# Altium PCB GPIOExpander.PcbDoc
Units mm, origin at the board's own origin, x right, y up, seen from the top; angles counter-clockwise.
Board outline 30.1 x 31.24 mm, 2 copper layers (Top Layer, Bottom Layer); 23 components, 36 nets, 92 pads, 14 vias.
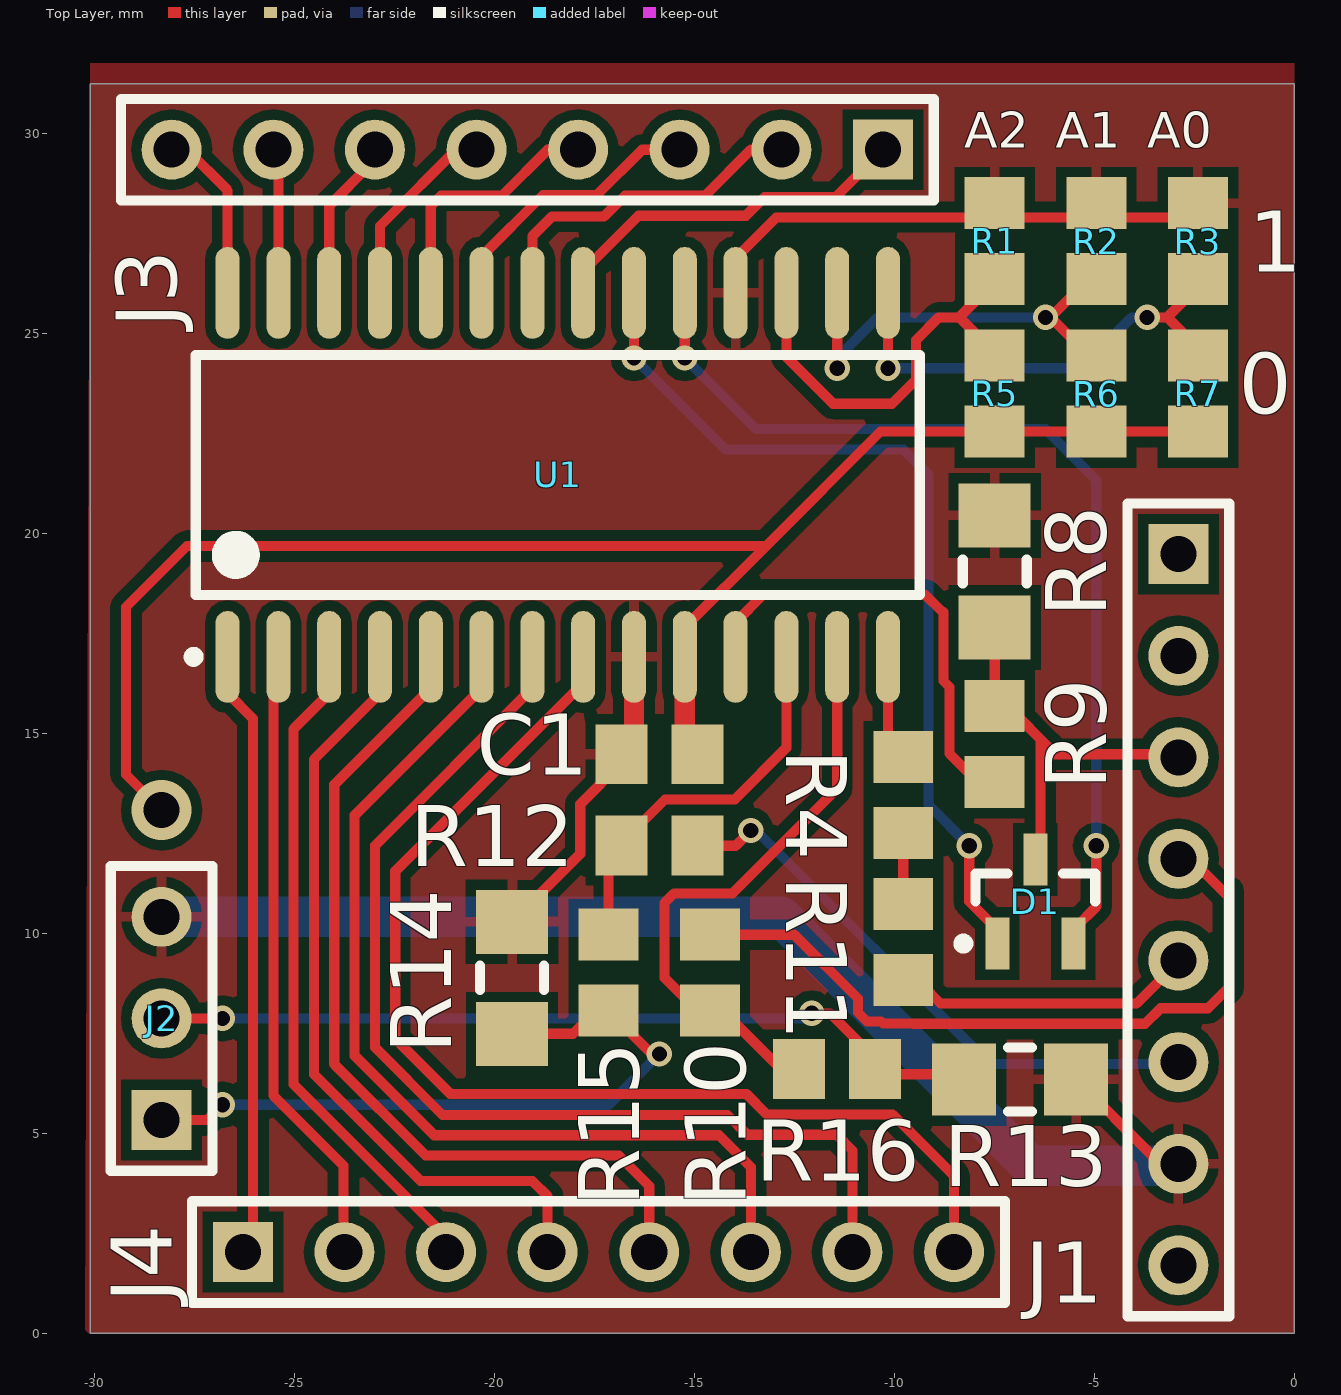
[diagram p0: Top Layer view]
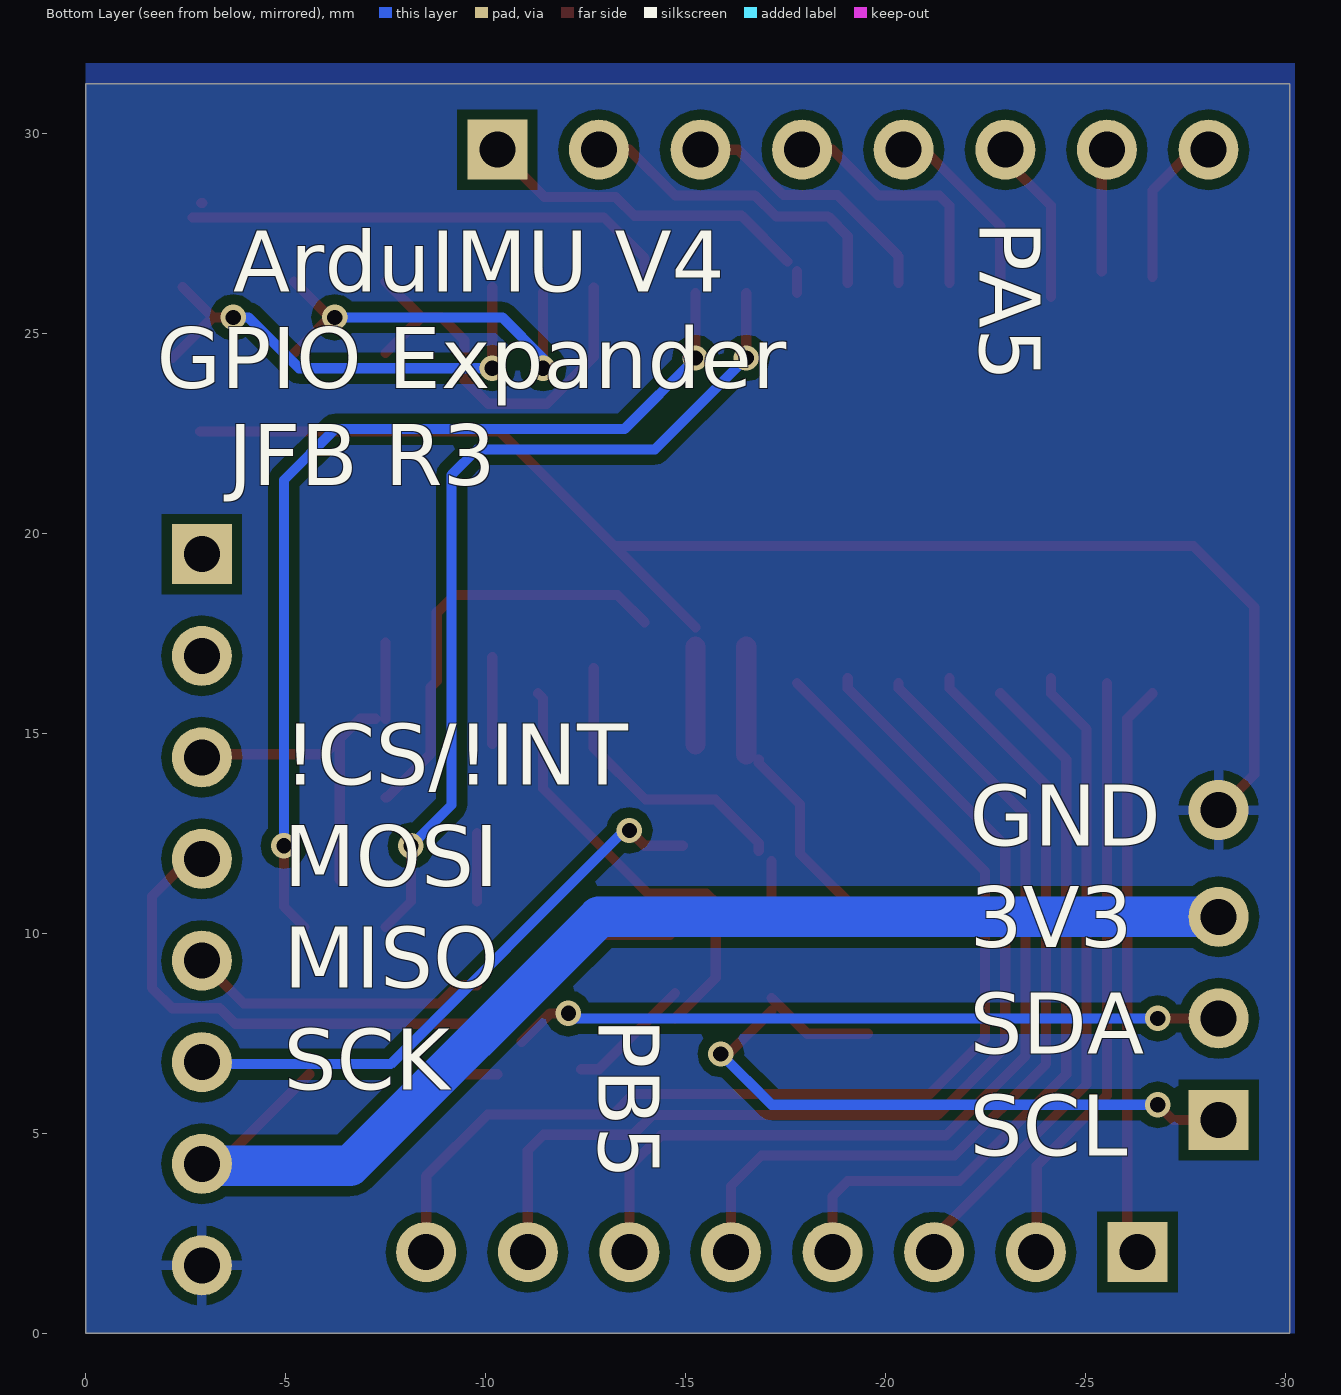
[diagram p1: Bottom Layer view, seen from below]

## Layer stack, top to bottom
Top Layer: signal copper 0.0356
Dielectric: core 0.32, FR-4, Dk 4.8
Bottom Layer: signal copper 0.0356

## Board outline
-30.099,0 -30.099,31.242 0,31.242 0,0

## Design rules (kind name [scope] priority, off if disabled: settings)
Clearance [All] p1: gap=0.254
PolygonConnect [All] p1: connectstyle=Relief reliefconductorwidth=0.254 reliefentries=4 polygonreliefangle="90 Angle" airgapwidth=0.254
RoomDefinition GPIOExpander [InComponentClass('GPIOExpander')] p1: confinementstyle=ConfineIn formatcopy=TRUE lockcomponents=FALSE outline -30.226,0 0,0 0,31.75 -30.226,31.75
RoutingVias microVias [All] p1: holewidth=0.001 width=0.001 viastyle="Through Hole" minholewidth=0 minwidth=0 maxholewidth=0 maxwidth=0.001
RoutingVias [All] p2: holewidth=0.711 width=1.27 viastyle="Through Hole" minholewidth=0.711 minwidth=1.27 maxholewidth=0.711 maxwidth=1.27
SolderMaskExpansion [All] p1: expansion=0.102
Width [All] p1: maxlimit=1.27 minlimit=0.254 preferedwidth=0.254
28 further rules are at their usual default settings.

## Components (designator, comment, footprint, x,y, rotation, side; value= is the part's Value field where it differs from the comment)
C1 "Cap" 6-0805 -15.875,14.478 r180 top
D1 "BAT54A" SOT23_N -6.477,10.795 r90 top
J1 "ArduIMU_Connector" HDR1X8 -2.9,19.48 r270 top
J2 "ArduIMU_I2C" HDR1X3 -28.321,5.334 r90 top
J3 "GPIO_A1" HDR1X8 -10.287,29.591 r180 top
J4 "GPIO_B1" HDR1X8 -26.289,2.032 r0 top
R1 "0" 6-0805 -7.493,27.305 r90 top
R2 "0" 6-0805 -4.953,27.305 r90 top
R3 "0" 6-0805 -2.413,27.305 r90 top
R4 "0" 6-0805 -9.779,13.462 r270 top
R5 "0" 6-0805 -7.493,23.495 r90 top
R6 "0" 6-0805 -4.953,23.495 r90 top
R7 "0" 6-0805 -2.413,23.495 r90 top
R8 "10K" 8-1206 -7.493,19.05 r270 top
R9 "0" 6-0805 -7.493,14.732 r270 top
R10 "0" 6-0805 -14.605,9.017 r90 top
R11 "0" 6-0805 -9.779,9.779 r270 top
R12 "0" 6-0805 -15.875,12.192 r0 top
R13 "10K" 8-1206 -6.858,6.35 r180 top
R14 "10K" 8-1206 -19.558,8.89 r270 top
R15 "0" 6-0805 -17.145,9.017 r270 top
R16 "0" 6-0805 -11.43,6.604 r0 top
U1 "MCP23S17-E/SO" SOIC-SO28_N -18.415,21.463 r90 top

## Footprints (in the part's own frame and the unit in brackets; to place one, negate y for a bottom-side part, rotate by r counter-clockwise, add the part's x,y. Pads: shape width x height; smd on the part's side, far side on the other; paste and mask are expansions set on the pad)
6-0805 [mm] "Chip Resistor; Body 2 x 1.2 mm (LxW typ)"
  rect 1.3x1.5 smd: 1(-0.95,0) 2(0.95,0)
8-1206 [mm] "Chip Resistor; Body 3.1 x 1.6 mm (LxW typ)"
  rect 1.6x1.8 smd: 1(-1.4,0) 2(1.4,0)
  silkscreen extent -0.3,-0.8 0.3,0.8
HDR1X3 [mm] "Connector; Header; 3 Position"
  rect 1.5x1.5 hole 0.9: 1(0,0)
  round 1.5 hole 0.9: 2(2.54,0) 3(5.08,0)
  silkscreen extent -1.27,-1.27 6.35,1.27
HDR1X8 [mm] "Connector; Header; 8 Position"
  rect 1.5x1.5 hole 0.9: 1(0,0)
  round 1.5 hole 0.9: 2(2.54,0) 3(5.08,0) 4(7.62,0) 5(10.16,0) 6(12.7,0) 7(15.24,0) 8(17.78,0)
  silkscreen extent -1.27,-1.27 19.05,1.27
SOIC-SO28_N [mm] "SOIC, 28-Leads, Body 17.9x7.5mm, Pitch 1.27mm, IPC Medium Density"
  oval 2.3x0.6 smd: 1(-4.55,8.255) 2(-4.55,6.985) 3(-4.55,5.715) 4(-4.55,4.445) 5(-4.55,3.175) 6(-4.55,1.905) 7(-4.55,0.635) 8(-4.55,-0.635) 9(-4.55,-1.905) 10(-4.55,-3.175) 11(-4.55,-4.445) 12(-4.55,-5.715) 13(-4.55,-6.985) 14(-4.55,-8.255) 15(4.55,-8.255) 16(4.55,-6.985) 17(4.55,-5.715) 18(4.55,-4.445) 19(4.55,-3.175) 20(4.55,-1.905) 21(4.55,-0.635) 22(4.55,0.635) 23(4.55,1.905) 24(4.55,3.175) 25(4.55,4.445) 26(4.55,5.715) 27(4.55,6.985) 28(4.55,8.255)
  silkscreen extent -4.67,-9.05 3,9.23, body extent -3.8,-9.06 3.8,9.06, height 2.65
SOT23_N [mm] "SOT23, 3-Leads, Body 2.9x1.3mm, Pitch 0.95mm, Lead Span 2.3mm, IPC Medium Density"
  rect 1.3x0.6 smd: 1(-1.05,0.95) 2(-1.05,-0.95) 3(1.05,0)
  silkscreen extent -1.17,-1.5 0.7,1.92, body extent -0.7,-1.5 0.7,1.5, height 1.1

## Part data
C1: "Capacitor"
D1: "Schottky Barrier Double Diode"
J1 J3 J4: library part "Header 8", "Header, 8-Pin"
J2: library part "Header 3", "Header, 3-Pin"
R1 R2 R3 R4 R5 R6 R7 R9 R10 R11 R12 R15 R16: library part ERJ6GE, "Thick Film Chip Resistor, 1 Ohm to 10M Ohm Range, 5% Tolerance, 0805 Size, 0.125 W"
R8 R13 R14: library part ERJ8GE, "Thick Film Chip Resistor, 1 Ohm to 10M Ohm Range, 5% Tolerance, 1206 Size, 0.25 W"
U1: "16-Bit I/O Expander with Serial Interface, 28-Pin SOIC, Extended Temperature"

## Via types
v1: diameter 0.635, hole 0.381, Top Layer to Bottom Layer, 13 vias
v2: diameter 1.5, hole 0.9, Top Layer to Bottom Layer, 1 vias

## Nets (pads, with @x,y where several pads share a name; then routed paths per layer and width w, separated by ;. In a path a pad name is that pad's centre, name@x,y a point inside that pad or via, vN(x,y) a via of type N, cw(c..) or ccw(c..) an arc to the next point about the centre after c; other vN are vias at no path point)
3V3: C1.2 J1.7 J2.3 R1.2 R2.2 R3.2 R8.1 R13.1 R14.1 U1.9 U1.18 | length 51.3
  Top Layer w0.254: R14.1@-19.558,10.287 -17.856,11.989 -17.856,13.227 -16.825,14.258 C1.2@-16.825,14.351 ; U1.18@-13.97,26.14 -13.97,26.882 -12.954,27.898 R3.2@-2.667,27.898 ; R13.1@-5.585,6.477 J1.7@-3.426,4.318 ; R3.2@-2.921,28.255 R3.2@-2.882,28.255
  Top Layer w0.508: C1.2@-16.51,14.478 U1.9 U1.9@-16.51,17.167
  Bottom Layer w1.016: J2.3 -12.827,10.414 -6.604,4.191 J1.7@-3.048,4.191
AIN1: J1.2
GND: C1.1 J1.8 R5.1 R6.1 R7.1 U1.10 | length 38.9
  Top Layer w0.254: v2(-28.321,13.081) -29.21,13.97 -29.21,18.161 -27.686,19.685 -13.208,19.685 ; U1.10@-15.24,17.653 -13.208,19.685 ; R7.1@-2.855,22.545 -2.921,22.545 -5.207,22.545 R5.1 -10.348,22.545 -13.208,19.685
  Top Layer w0.508: C1.1@-15.24,14.732 U1.10@-15.24,17.167
GPIO1_A0: R3.1 R7.2 U1.15 | length 12.2
  Top Layer w0.254: v1@-10.287,24.003 v1(-10.16,24.13) U1.15 U1.15@-10.16,26.162 ; v1(-3.683,25.4) -3.175,25.4 ; R3.1@-2.413,26.162 -3.175,25.4 ; R7.2@-2.159,24.384 -3.175,25.4
  Bottom Layer w0.254: v1(-10.16,24.13) -5.334,24.13 -4.064,25.4 v1(-3.683,25.4)
GPIO1_A1: R2.1 R6.2 U1.16 | length 10.4
  Top Layer w0.254: v1(-11.43,24.13) U1.16 U1.16@-11.43,26.035 ; v1(-6.223,25.4) v1@-6.096,25.4 ; R6.2@-5.207,24.511 v1@-6.096,25.4 ; R2.1@-5.207,26.289 v1@-6.096,25.4
  Bottom Layer w0.254: v1(-11.43,24.13) -11.43,24.384 -10.414,25.4 v1(-6.223,25.4)
GPIO1_A2: R1.1 R5.2 U1.17 | length 10.5
  Top Layer w0.254: U1.17@-12.7,26.14 -12.7,24.412 -11.529,23.241 -10.061,23.241 -9.461,23.841 -9.461,24.828 -8.89,25.4 -8.382,25.4 ; R5.2@-7.493,24.511 -8.382,25.4 ; R1.1@-7.493,26.289 -8.382,25.4
MISO: J1.5 R11.2 | length 7.5
  Top Layer w0.254: R11.2@-9.779,8.702 -9.305,8.702 -8.85,8.247 -3.945,8.247 J1.5@-2.921,9.271
MISO/-: R4.2 R11.1 | length 1.7
  Top Layer w0.254: R11.1@-9.779,10.795 R4.2
MOSI: J1.4 R10.2 | length 18.4
  Top Layer w0.254: R10.2 -12.507,9.967 -10.91,8.37 -10.91,8.021 -10.687,7.798 -10.338,7.798 -10.287,7.747 -9.525,7.747 ; -9.525,7.739 -3.735,7.739 -3.346,8.128 -2.159,8.128 -1.651,8.636 -1.651,10.922 -2.589,11.86 J1.4
MOSI/SDA: R10.1 R16.1 U1.13 | length 14.4
  Top Layer w0.254: R10.1@-14.732,7.874 -15.748,8.89 -15.748,10.763 -15.513,10.998 -14.053,10.998 -11.43,13.621 -11.43,15.875 U1.13@-11.303,16.002 ; R10.1@-14.732,8.509 -12.827,6.604 R16.1
NetD1_1: D1.1 U1.20 | length 22.2
  Top Layer w0.254: v1(-16.51,24.384) U1.20 ; v1(-8.128,12.192) -8.128,10.795 D1.1@-7.493,10.16
  Bottom Layer w0.254: v1(-16.51,24.384) -14.224,22.098 -9.779,22.098 -9.144,21.463 -9.144,13.208 v1(-8.128,12.192)
NetD1_2: D1.2 U1.19 | length 24.6
  Top Layer w0.254: v1(-15.24,24.384) U1.19 ; D1.2@-5.461,10.16 -4.953,10.668 v1(-4.953,12.192)
  Bottom Layer w0.254: v1(-15.24,24.384) -13.462,22.606 -6.223,22.606 -4.953,21.336 v1(-4.953,12.192)
NetJ2_1: J2.1 R14.2 R15.2 | length 17.4
  Top Layer w0.254: J2.1 -27.178,5.334 v1(-26.797,5.715) ; R14.2 -18.037,7.49 R15.2@-17.145,8.382 ; R15.2 v1@-16.063,6.985
  Bottom Layer w0.254: v1(-26.797,5.715) -17.145,5.715 v1(-15.875,6.985)
NetJ2_2: J2.2 R13.2 R16.2 | length 19.7
  Top Layer w0.254: J2.2 -27.432,7.874 v1(-26.797,7.874) ; v1(-12.065,8.001) -11.608,8.001 R16.2@-10.897,7.29 ; R16.2@-10.287,6.477 R13.2@-8.385,6.477
  Bottom Layer w0.254: v1(-26.797,7.874) -12.192,7.874 v1(-12.065,8.001)
NetJ3_1: J3.1 U1.21 | length 8.7
  Top Layer w0.254: U1.21 U1.21@-17.78,26.556 ; U1.21@-17.539,26.797 -16.396,27.94 -13.716,27.94 -13.25,28.406 -11.472,28.406 J3.1@-10.499,29.379
NetJ3_2: J3.2 U1.22 | length 8.1
  Top Layer w0.254: U1.22@-19.05,26.267 -19.05,27.432 -18.558,27.924 -17.256,27.924 -16.748,28.432 ; -16.732,28.448 -14.732,28.448 -13.589,29.591 J3.2@-12.954,29.591
NetJ3_3: J3.3 U1.23 | length 6.8
  Top Layer w0.254: U1.23@-20.32,26.267 -20.32,26.924 -18.784,28.46 -17.439,28.46 -16.308,29.591 J3.3@-15.24,29.591
NetJ3_4: J3.4 U1.24 | length 5.7
  Top Layer w0.254: U1.24@-21.59,26.267 -21.59,28.194 -21.336,28.448 -19.812,28.448 -18.669,29.591 J3.4@-18.415,29.591
NetJ3_5: J3.5 U1.25 | length 4.3
  Top Layer w0.254: U1.25@-22.86,26.267 -22.86,27.686 J3.5@-20.828,29.718
NetJ3_6: J3.6 U1.26 | length 3.7
  Top Layer w0.254: U1.26@-24.13,25.908 -24.13,28.194 J3.6@-23.114,29.21
NetJ3_7: J3.7 U1.27 | length 3
  Top Layer w0.254: U1.27@-25.4,26.543 J3.7@-25.4,29.591
NetJ3_8: J3.8 U1.28 | length 4.1
  Top Layer w0.254: J3.8@-28.194,29.591 -27.686,29.591 -26.67,28.575 U1.28@-26.67,26.416
NetJ4_1: J4.1 U1.1 | length 14.6
  Top Layer w0.254: U1.1@-26.67,16.002 -26.035,15.367 -26.035,1.809 J4.1@-26.162,1.682
NetJ4_2: J4.2 U1.2 | length 14.8
  Top Layer w0.254: U1.2@-25.527,16.256 -25.527,5.946 -23.772,4.191 J4.2@-23.772,2.182
NetJ4_3: J4.3 U1.3 | length 16.1
  Top Layer w0.254: U1.3@-24.13,16.383 -24.13,16.002 -25.019,15.113 -25.019,6.223 J4.3@-21.082,2.286
NetJ4_4: J4.4 U1.4 | length 18.5
  Top Layer w0.254: U1.4@-22.86,16.002 -24.511,14.351 -24.511,6.477 -21.844,3.81 -19.05,3.81 -18.669,3.429 J4.4@-18.669,2.286
NetJ4_5: J4.5 U1.5 | length 21.4
  Top Layer w0.254: U1.5@-21.59,16.383 -21.59,16.129 -24.003,13.716 -24.003,6.731 -21.717,4.445 -16.891,4.445 -16.129,3.683 J4.5
NetJ4_6: J4.6 U1.6 | length 23.7
  Top Layer w0.254: U1.6@-20.32,16.256 -20.32,16.129 -23.495,12.954 -23.495,6.941 -21.507,4.953 -14.383,4.953 -13.589,4.159 J4.6@-13.589,2.159
NetJ4_7: J4.7 U1.7 | length 26.2
  Top Layer w0.254: U1.7@-19.05,16.383 -19.05,16.129 -22.987,12.192 -22.987,7.152 -21.296,5.461 -14.173,5.461 -13.677,4.965 -11.442,4.965 -11.049,4.572 J4.7@-11.049,2.286
NetJ4_8: J4.8 U1.8 | length 28.1
  Top Layer w0.254: U1.8@-17.78,16.256 -22.479,11.557 -22.479,7.362 -21.104,5.988 -13.702,5.988 -13.188,5.473 -10.045,5.473 -8.509,3.937 J4.8
NetR4_1: R4.1 U1.14 | length 2.2
  Top Layer w0.254: R4.1@-10.16,14.732 U1.14
NetR9_2: R9.2 U1.11 | length 10.8
  Top Layer w0.254: U1.11@-13.97,17.78 -13.289,18.461 -9.225,18.461 -8.798,18.034 ; -8.774,18.034 -8.774,16.311 -8.624,16.161 -8.624,14.493 -7.532,13.401 R9.2@-7.493,13.401
PWM1: D1.3 J1.3 R8.2 R9.1 | length 10
  Top Layer w0.254: R9.1@-7.493,15.367 R8.2@-7.493,17.269 ; R9.1@-7.239,15.367 -6.858,15.367 -6.35,14.859 ; D1.3@-6.35,11.337 -6.35,14.859 ; J1.3@-3.048,14.478 -5.969,14.478 -6.35,14.859
RST1: J1.1
SCK: J1.6 R12.2 | length 14.5
  Top Layer w0.254: R12.2 -13.97,12.192 v1(-13.589,12.573)
  Bottom Layer w0.254: v1(-13.589,12.573) -13.462,12.573 -7.62,6.731 J1.6@-3.048,6.731
SCK/SCL: R12.1 R15.1 U1.12 | length 8.8
  Top Layer w0.254: R15.1@-17.145,10.348 R12.1@-17.145,11.811 ; R12.1@-16.825,12.065 -16.825,12.258 -15.736,13.347 -13.99,13.347 -12.7,14.637 U1.12@-12.7,16.637

## Polygon pours and split planes (outlines as drawn)
GND on Bottom Layer "Top Layer-No Net" (solid, pour order 9): -30.226,31.75 -30.226,0 0,0 0,31.75
3V3 on Top Layer "Top Layer-No Net" (solid, pour order 19): -30.101,31.75 0.002,31.75 0.002,0.127 0.127,0 -30.226,0

## Silkscreen, mask and mechanical layers (free items; w line width, h text height)
Top Overlay:
  text "A2" at -8.255,29.337 h1.52
  text "A1" at -5.969,29.337 h1.52
  text "A0" at -3.683,29.337 h1.52
  text "1" at -1.143,26.543 h1.52
  text "0" at -1.397,22.987 h1.52
Bottom Overlay:
  text "PA5" at -22.352,27.813 h1.52 r90
  text "ArduIMU V4" at -3.683,26.035 h1.52
  text "GPIO Expander" at -1.778,23.622 h1.52
  text "JFB R3" at -3.556,21.209 h1.52
  text "!CS/!INT" at -4.953,13.716 h1.52
  text "GND" at -22.098,12.192 h1.52
  text "MOSI" at -4.953,11.176 h1.52
  text "3V3" at -22.098,9.652 h1.52
  text "MISO" at -4.953,8.636 h1.52
  text "PB5" at -12.827,7.874 h1.52 r90
  text "SDA" at -22.098,6.985 h1.52
  text "SCK" at -4.953,6.096 h1.52
  text "SCL" at -22.098,4.445 h1.52